# EAGLE board PCBV2 v32 (EAGLE 9.7.0)
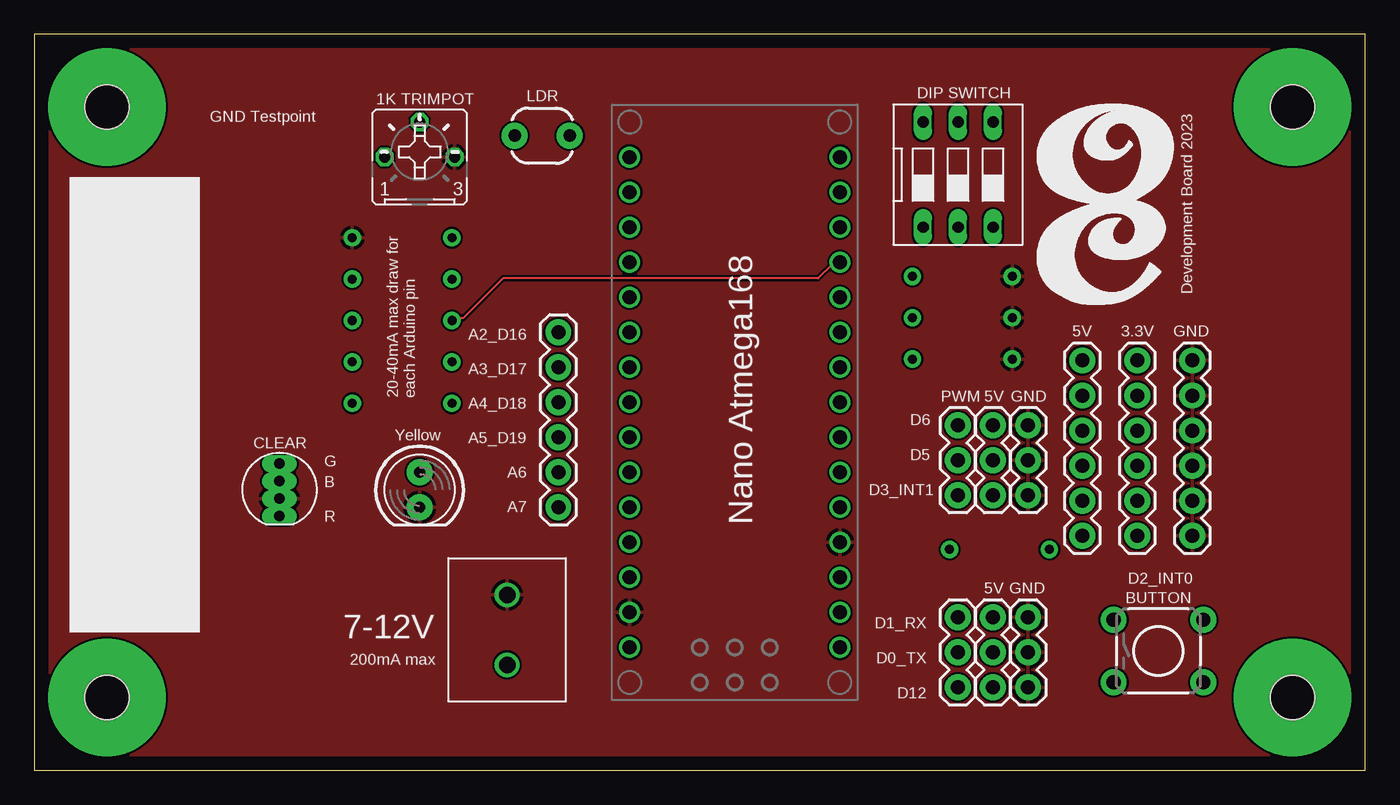
[diagram p0: board, top side]
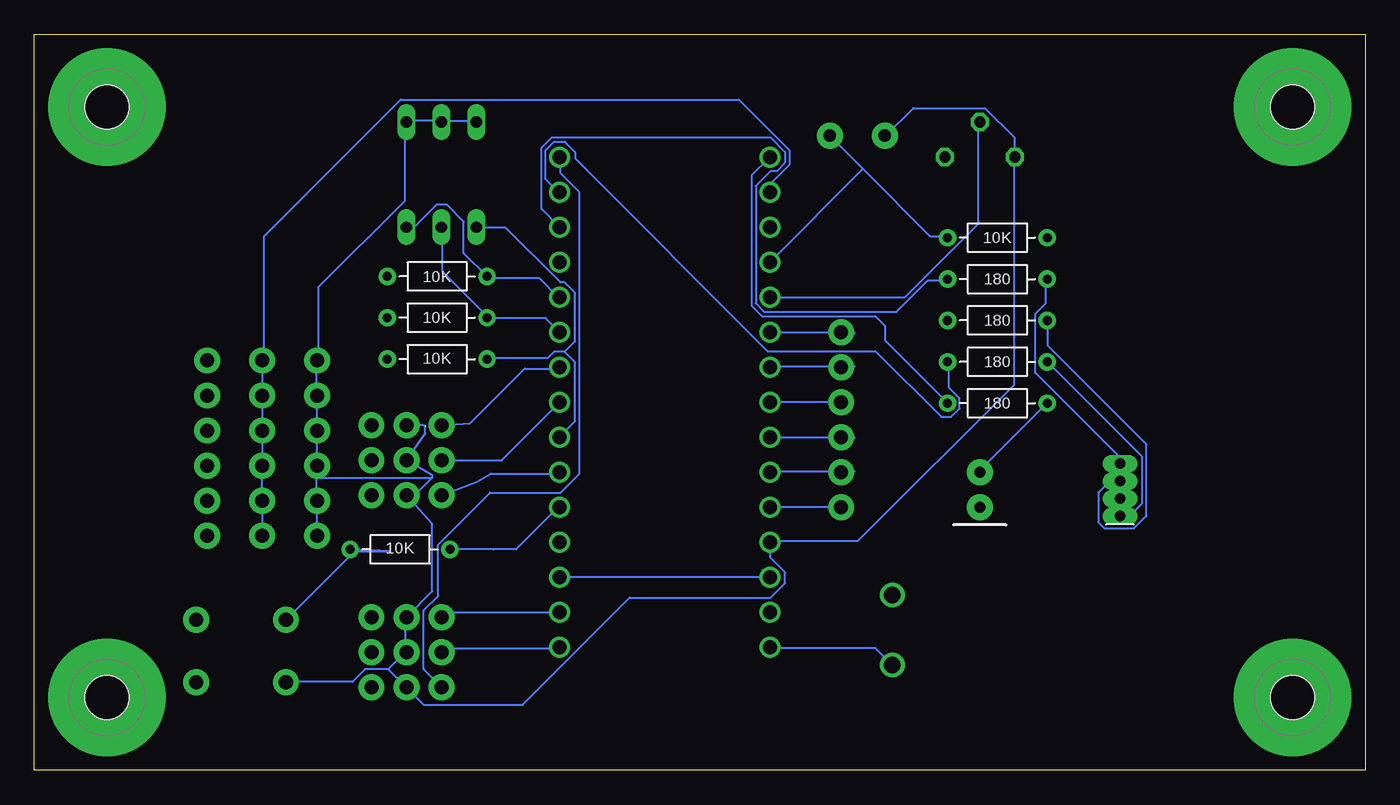
[diagram p1: board, bottom side, seen from below]

Size 96.52 x 53.34 mm. Coordinates in mm from the lower left corner, seen from the top.
Outline: 0,0 96.52,0 96.52,53.34 0,53.34 0,0
Copper layers (1*16): Top 0.035mm / dielectric 1.5mm / Bottom 0.035mm
Design rules "default": minimum track width 6mil, minimum drill 0.35mm, track to track 6mil, track to pad 6mil, pad to pad 6mil, via to via 6mil, smd to smd 6mil, copper to edge 40mil, drill to drill 6mil, minimum pad ring 10mil, minimum via ring 8mil, stop-mask expansion 4mil, vias tented up to drill 0mil, thermal gap 10mil

## Footprints (pad centres in the part's own frame; a part is rotated, then mirrored left to right if it is on the bottom)
LED_5MM = drill 0.813 pad 1.88: A -1.27,0; K 1.27,0
LED-RGB-THRU = drill 0.762 pad 0.889 long: 1 1.905,0; 2 0.635,0; 3 -0.635,0; 4 -1.905,0
1X03 = drill 1.016 pad 1.88: 1 0,0; 2 2.54,0; 3 5.08,0
NANO = drill 1.016: 1 -7.62,17.78; 2 -7.62,15.24; 3 -7.62,12.7; 4 -7.62,10.16; 5 -7.62,7.62; 6 -7.62,5.08; 7 -7.62,2.54; 8 -7.62,0; 9 -7.62,-2.54; 10 -7.62,-5.08; 11 -7.62,-7.62; 12 -7.62,-10.16; 13 -7.62,-12.7; 14 -7.62,-15.24; 15 -7.62,-17.78; 16 7.62,-17.78; 17 7.62,-15.24; 18 7.62,-12.7; 19 7.62,-10.16; 20 7.62,-7.62; 21 7.62,-5.08; 22 7.62,-2.54; 23 7.62,0; 24 7.62,2.54; 25 7.62,5.08; 26 7.62,7.62; 27 7.62,10.16; 28 7.62,12.7; 29 7.62,15.24; 30 7.62,17.78
1X06 = drill 1.016 pad 1.88: 1 0,0; 2 2.54,0; 3 5.08,0; 4 7.62,0; 5 10.16,0; 6 12.7,0
STANDOFF_HEX_FEMALE_550X1000_M3X0.5_MTGP850H320 = drill 3.2 pad 8.5: 1 0,0 | hole 3.2: 0,0
PHOTOCELL-KIT = drill 0.9 pad 1.88: 1 -2,0; 2 2,0
RESAD724W46L381D178B = drill 0.66 pad 1.26: 1 -3.62,0; 2 3.62,0
B25P = drill 0.813 octagon: A -2.54,0; E 2.54,0; S 0,2.54
TACTILE_SWITCH_PTH_6.0MM_KIT = drill 1.016 pad 1.88: 1 -3.251,2.261; 2 3.251,2.261; 3 -3.251,-2.261; 4 3.251,-2.261
DS-03 = drill 0.813 long: 1 -2.54,-3.81; 2 0,-3.81; 3 2.54,-3.81; 4 2.54,3.81; 5 0,3.81; 6 -2.54,3.81
TERMBLK_508-2N = drill 1.2: 1 0,0; 2 5.08,0

## Placement (x,y rotation side)
D2  Yellow  [LED_5MM]  27.94,20.32 270 top
D3  CLEAR  [LED-RGB-THRU]  17.78,20.32 270 top
J1  [1X03]  67,6 90 top
J2  5V  [1X03]  69.54,6 90 top
J3  NANO_FOOTPRINT  [NANO]  50.8,26.67 180 top
J4  5V  [1X03]  69.54,25 270 top
J7  [1X03]  67,25 270 top
J8  GND  [1X03]  72.08,25 270 top
J10  GND  [1X06]  84,17 90 top
J11  GND  [1X03]  72.08,6 90 top
J12  [1X06]  38,19.05 90 top
J13  5V  [1X06]  76,17 90 top
J14  3.3V  [1X06]  80,17 90 top
MP1  STANDOFF_F/F_M3_10MM  [STANDOFF_HEX_FEMALE_550X1000_M3X0.5_MTGP850H320]  5.27,5.27 0 bottom
MP2  STANDOFF_F/F_M3_10MM  [STANDOFF_HEX_FEMALE_550X1000_M3X0.5_MTGP850H320]  91.25,48.07 0 bottom
MP3  STANDOFF_F/F_M3_10MM  [STANDOFF_HEX_FEMALE_550X1000_M3X0.5_MTGP850H320]  5.27,48.07 0 bottom
MP4  STANDOFF_F/F_M3_10MM  [STANDOFF_HEX_FEMALE_550X1000_M3X0.5_MTGP850H320]  91.25,5.27 0 bottom
R1  LDR  [PHOTOCELL-KIT]  36.83,46 0 top
R3  180  [RESAD724W46L381D178B]  26.67,26.6 180 bottom
R4  1K TRIMPOT  [B25P]  27.94,44.45 0 top
R5  10K  [RESAD724W46L381D178B]  70,16 0 bottom
R6  180  [RESAD724W46L381D178B]  26.67,32.6 180 bottom
R7  180  [RESAD724W46L381D178B]  26.67,35.6 180 bottom
R8  180  [RESAD724W46L381D178B]  26.67,29.6 180 bottom
R9  10K  [RESAD724W46L381D178B]  26.67,38.6 180 bottom
R10  10K  [RESAD724W46L381D178B]  67.31,35.8 0 bottom
R11  10K  [RESAD724W46L381D178B]  67.31,32.8 0 bottom
R12  10K  [RESAD724W46L381D178B]  67.31,29.8 0 bottom
S2  BUTTON  [TACTILE_SWITCH_PTH_6.0MM_KIT]  81.53,8.64 0 top
S3  DIP SWITCH  [DS-03]  67,43.18 0 top
U$1  2828XX-2282837-2  [TERMBLK_508-2N]  34.29,7.62 90 top

## Library data of the parts
D2 = SparkFun-LED
D3 = SparkFun-LED; PROD_ID: DIO-08418
J1 J2 J4 J7 J8 J11 = SparkFun-Connectors
J3 = SparkFun-Boards
J10 J12-J14 = SparkFun-Connectors; PROD_ID: CONN-08437
MP1-MP4 = PCB-Fasteners_Hardware; CATEGORY: Standoff/Spacer; SUB-CATEGORY: Female-Female
R1 = SparkFun-Sensors; PROD_ID: COMP-09129; SF_ID: SEN-09088
R3 R5-R12 = Resistor; CATEGORY: Resistor; SUB-CATEGORY: Fixed
R4 = pot
S2 = SparkFun-Switches; PROD_ID: SWCH-08441; SF_SKU: COM-00097
S3 = Switch; CATEGORY: SWITCH; TYPE: SPST
U$1 = Connector; CATEGORY: Connector; DESCRIPTION: 2 Position Wire to Board Terminal Block Horizontal with Board 5.08 mm Through Hole; MANUFACTURER: TE Connectivity; MPN: 282837-2; OPERATING_TEMPERATURE: -40°C to +105°C; PART_STATUS: ACTIVE; ROHS_COMPLIANCE: RoHS Compliant; SERIES: 282837; SUBCATEGORY: Terminal Block; TYPE: Side Wire Entry

## Nets
+3.3V: J3.17 J14.1 J14.2 J14.3 J14.4 J14.5 J14.6
+5V: J2.1 J2.2 J2.3 J3.27 J4.1 J4.2 J4.3 J13.1 J13.2 J13.3 J13.4 J13.5 J13.6 R1.1 R4.A S2.3 S3.4 S3.5 S3.6
+9V: J3.30 U$1.1
A0: J3.19 R1.2 R9.2
A1: J3.20 R4.S
A2: J3.21 J12.6
A3: J3.22 J12.5
A4: J3.23 J12.4
A5: J3.24 J12.3
A6: J3.25 J12.2
A7: J3.26 J12.1
D2: J3.5 R5.2
D3: J3.6 J7.3
D4: J3.7 R12.2 S3.1
D5: J3.8 J7.2
D6: J3.9 J7.1
D7: J3.10 R11.2 S3.2
D8: J3.11 R10.2 S3.3
D9: J3.12 R6.2
D10: J3.13 R7.2
D11: J3.14 R8.2
D12: J1.1 J3.15
D13: J3.16 R3.2
GND: D2.K D3.2 J3.4 J3.29 J8.1 J8.2 J8.3 J10.1 J10.2 J10.3 J10.4 J10.5 J10.6 J11.1 J11.2 J11.3 R4.E R9.1 R10.1 R11.1 R12.1 U$1.2
N$1: D2.A R3.1
N$3: D3.3 R6.1
N$4: R5.1 S2.1
N$5: D3.4 R7.1
N$6: D3.1 R8.1
REF: J3.18
RST: J3.3 J3.28
RX1: J1.3 J3.2
TX1: J1.2 J3.1

## Tracks (layer width: path | path; a pad name or v marks a point on that pad's centre or on a via)
+3.3V
  Bottom 0.152: J14.1 80.01,17.07 80.01,19.51 J14.2 80.01,19.66 80.01,21.95 J14.3 80.01,22.1 80.01,24.54 J14.4 80.01,24.69 80.01,27.13 J14.5 80.01,27.28 80.01,29.57 J14.6 79.86,29.72 79.86,38.71 69.95,48.62 45.41,48.62 41.76,44.96 41.76,43.89 43.13,42.52 43.13,41.91 J3.17
+5V  (1 unrouted)
  Bottom 0.152: 67.67,21.18 67.67,21.36 J4.2 68.17,24.37 68.17,24.99 | J13.1 76.05,17.07 76.05,19.51 J13.2 76.05,19.66 76.05,21.18 | 76.05,21.18 76.05,21.95 J13.3 | S3.6 64.47,47.09 66.9,47.09 S3.5 67.06,47.09 69.49,47.09 S3.4 69.65,46.94 69.65,41.3 75.89,35.05 75.89,29.72 J13.6 76.05,29.57 76.05,27.28 J13.5 76.05,27.13 76.05,24.69 J13.4 76.05,24.54 76.05,22.1 J13.3 | 76.05,21.18 67.67,21.18 | 76.05,21.18 J13.3 | 70.87,7.32 72.54,7.32 73.46,6.4 78.18,6.4 S2.3 | 70.87,7.32 69.65,8.53 J2.2 69.65,8.69 69.65,10.97 J2.3 69.49,11.12 67.67,12.95 67.67,17.84 J4.3 68.93,19.92 67.67,21.18 | R1.1 34.75,46.02 32.77,48.01 27.58,48.01 25.45,45.87 25.45,44.5 R4.A 25.45,44.35 25.45,27.95 36.79,16.61 43.13,16.61 J3.27 43.13,16.46 43.13,15.39 42.06,14.33 42.06,13.56 43.13,12.5 53.34,12.5 61.11,4.72 68.28,4.72 69.49,5.94 J2.1 69.65,6.1 70.87,7.32 | 68.17,24.88 68.29,25 J4.1
+9V
  Bottom 0.152: U$1.1 35.51,8.84 43.13,8.84 J3.30
A0
  Bottom 0.152: 36.42,43.59 38.71,45.87 R1.2 | 36.42,43.59 31.55,38.71 30.33,38.71 R9.2 | 36.42,43.59 J3.19
A1
  Bottom 0.152: J3.20 33.38,34.29 28.04,39.62 28.04,46.94 R4.S
A2
  Bottom 0.152: J3.21 43.13,31.7 37.03,31.7 J12.6
A3
  Bottom 0.152: J3.22 43.13,29.26 37.03,29.26 J12.5
A4
  Bottom 0.152: J12.4 J3.23
A5
  Bottom 0.152: J3.24 43.13,24.08 37.03,24.08 J12.3
A6
  Bottom 0.152: J3.25 43.13,21.64 37.03,21.64 J12.2
A7
  Bottom 0.152: J12.1 J3.26
D2
  Bottom 0.152: R5.2 63.25,16 61.57,16 58.52,19.05 J3.5
D3
  Bottom 0.152: J3.6 58.52,21.49 63.4,21.49 64.42,20.9 J7.3
D4
  Bottom 0.152: 58.06,30.33 58.83,30.33 59.28,29.87 63.55,29.87 R12.2 | 58.06,30.33 57.3,29.57 57.3,25.3 58.37,24.23 J3.7 | 58.06,30.33 57.3,31.09 57.3,34.59 58.06,35.36 58.37,35.36 62.33,39.32 64.31,39.32 S3.1
D5
  Bottom 0.152: J7.2 62.63,22.46 J3.8
D6
  Bottom 0.152: J3.9 58.52,29.11 60.96,29.11 64.92,25.15 J7.1
D7
  Bottom 0.152: J3.10 59.44,32.77 63.55,32.77 R11.2 63.7,32.92 66.9,36.12 66.9,39.32 S3.2
D8
  Bottom 0.152: J3.11 58.52,34.29 59.89,35.66 63.55,35.66 R10.2 63.7,35.81 65.38,37.49 65.38,39.78 66.6,41 67.36,41 68.89,39.47 69.49,39.47 S3.3
D9
  Top 0.152: R6.2 30.33,32.61 30.79,32.61 30.94,32.77 31.09,32.77 33.98,35.66 56.84,35.66 57.91,36.73 58.37,36.73 J3.12
D10
  Bottom 0.152: J3.13 59.74,40.69 59.74,45.11 58.98,45.87 43.13,45.87 42.06,44.81 42.06,44.04 42.67,43.43 43.13,43.43 44.2,42.37 44.2,33.83 43.59,33.22 33.98,33.22 31.7,35.51 30.33,35.51 R7.2
D11
  Bottom 0.152: R8.2 30.18,29.57 30.18,27.74 29.41,26.98 29.41,26.21 30.02,25.6 30.74,25.6 35.52,30.38 43.33,30.38 57.3,44.35 57.3,44.81 58.06,45.57 58.83,45.57 59.44,44.96 59.44,42.82 58.52,41.91 J3.14
D12
  Bottom 0.152: J3.15 58.37,44.35 58.37,43.28 57,41.91 57,21.49 58.37,20.12 63.48,20.12 67.24,16.36 67.24,12.62 68.28,11.58 68.28,7.32 67.06,6.1 J1.1
D13
  Bottom 0.152: J3.16 44.5,43.13 44.5,33.68 43.74,32.92 35.52,32.92 34.83,32.23 34.83,31.17 30.29,26.63 R3.2
GND
  pour Top: 0.13,0.13 96.39,0.13 96.39,53.21 0.13,53.21
N$1
  Bottom 0.152: R3.1 23.16,26.52 28.04,21.64 D2.A
N$3
  Bottom 0.152: R6.1 23.01,32.46 23.01,30.79 15.85,23.62 15.85,18.44 16.76,17.53 18.9,17.53 19.36,17.98 19.36,20.12 18.59,20.88 17.83,20.88 D3.3
N$4
  Bottom 0.152: R5.1 70.71,15.85 73.3,15.85 78.18,10.97 S2.1
N$5
  Bottom 0.152: R7.1 23.16,35.51 23.16,33.83 23.93,33.07 23.93,28.8 17.83,22.71 17.83,22.25 D3.4
N$6
  Bottom 0.152: R8.1 23.01,29.57 16.15,22.71 16.15,19.36 17.07,18.44 17.68,18.44 D3.1
RST
  Bottom 0.152: J3.28 43.28,14.02 58.37,14.02 J3.3
RX1
  Bottom 0.152: J3.2 66.6,11.43 66.9,11.12 J1.3
TX1
  Bottom 0.152: J3.1 58.52,8.84 66.75,8.84 66.9,8.69 J1.2

## Text on the board
tPlace: D2_INT0
tNames: GND Testpoint | Development Board 2023 | 20-40mA max draw for / each Arduino pin | Nano Atmega168 | 7-12V | 200mA max
200bmp: C:/Users/David/Desktop/logo.bmp